# Altium PCB ButtonsBrightnessPCB.PcbDoc
Units mm, origin at the board's own origin, x right, y up, seen from the top; angles counter-clockwise.
Board outline 70.08 x 83.18 mm, 2 copper layers (Top Layer, Bottom Layer); 51 components, 47 nets, 186 pads, 14 vias.
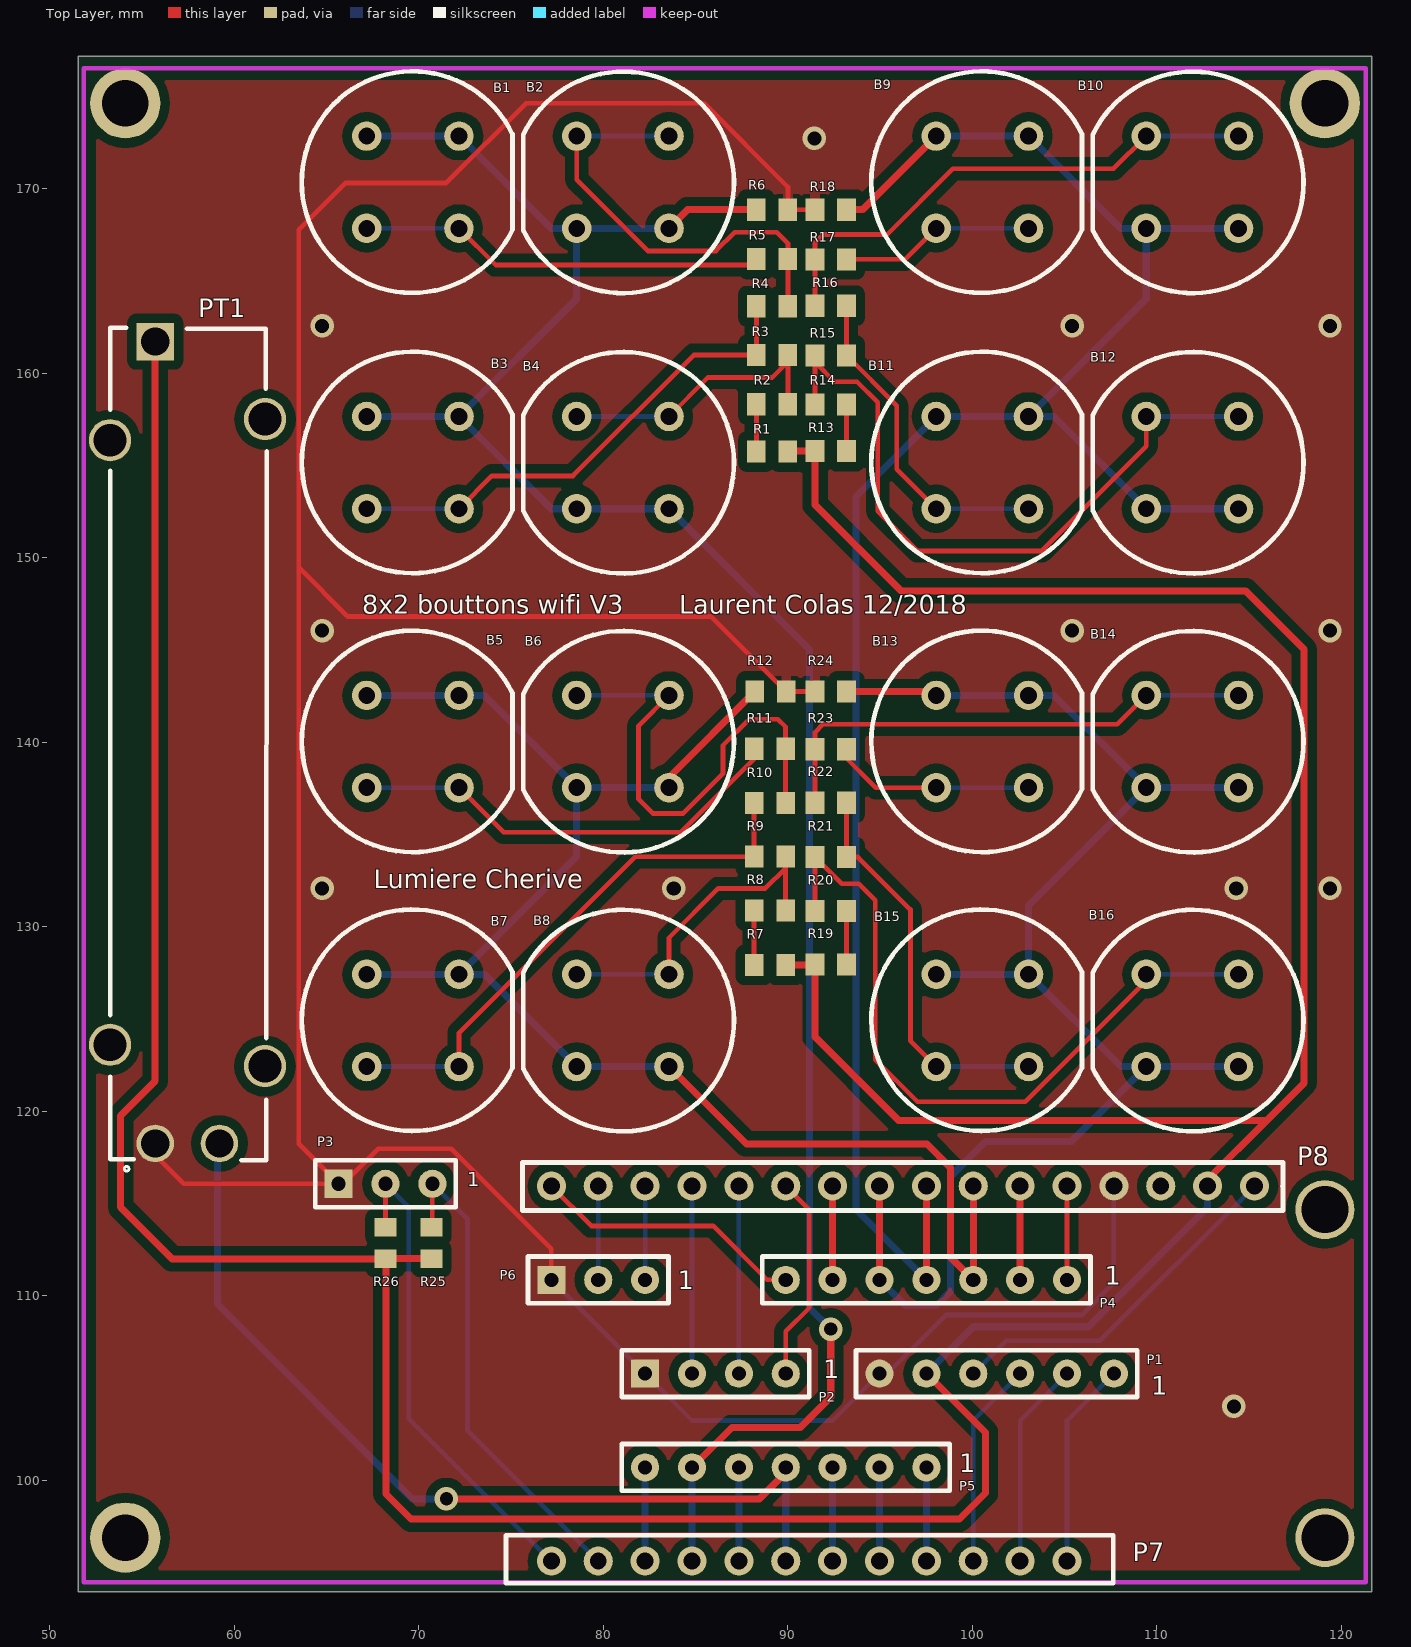
[diagram p0: Top Layer view]
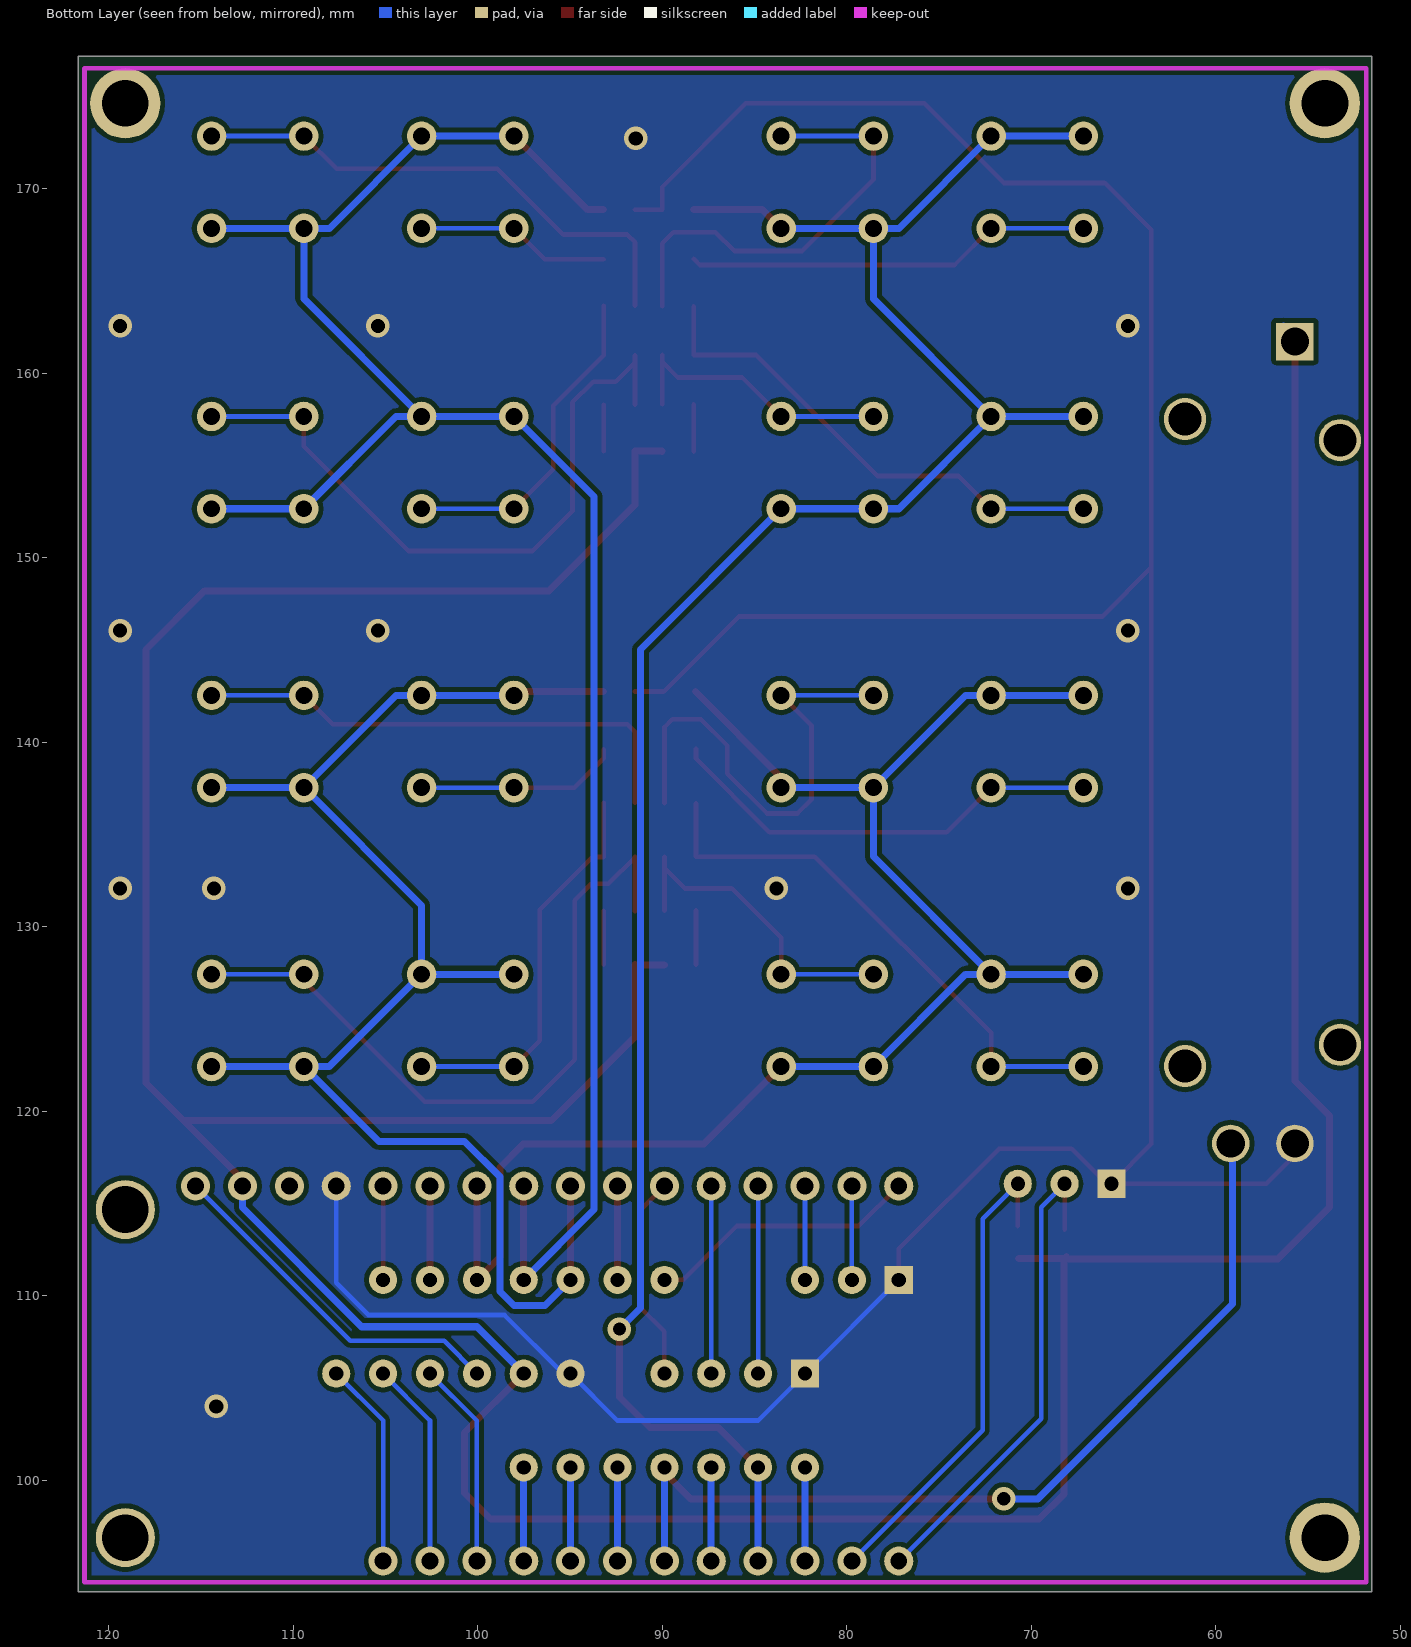
[diagram p1: Bottom Layer view, seen from below]

## Layer stack, top to bottom
Top Solder: solder mask 0.0102, Solder Resist, Dk 3.5
Top Layer: signal copper 0.0356
Dielectric 1: dielectric 0.32, FR-4, Dk 4.8
Bottom Layer: signal copper 0.0356
Bottom Solder: solder mask 0.0102, Solder Resist, Dk 3.5

## Board outline
51.562,93.98 121.641,93.98 121.641,177.165 51.562,177.165

## Design rules (kind name [scope] priority, off if disabled: settings)
Clearance Clearance_4 [InNamedPolygon('GND_L01_P000')] p1: gap=0.508 ignorepadtopadclearanceinfootprint=FALSE
Clearance Clearance_3 [InNamedPolygon('GND_L02_P002')] p2: gap=0.254 ignorepadtopadclearanceinfootprint=FALSE except(0: Arc-Hole Track-Hole SMDPad-Hole THPad-Hole Via-Hole Fill-Hole Poly-Hole Region-Hole Text-Hole)
Clearance Clearance_2 [InNamedPolygon('GND_L02_P002')] p3: gap=0.254 ignorepadtopadclearanceinfootprint=FALSE except(0: Arc-Hole Track-Hole SMDPad-Hole THPad-Hole Via-Hole Fill-Hole Poly-Hole Region-Hole Text-Hole)
Clearance Clearance_1 [InNamedPolygon('GND_L01_P000')] p4: gap=0.508 ignorepadtopadclearanceinfootprint=FALSE
Clearance [All] p5: gap=0.203 ignorepadtopadclearanceinfootprint=FALSE
PolygonConnect PolygonConnect_15 [All vs IsNamedPolygon('GND_L01_P000')] p1: thpad.connectstyle=Direct thpad.reliefconductorwidth=0.254 thpad.reliefentries=4 thpad.polygonreliefangle="90 Angle" thpad.airgapwidth=0.254 smdpad.connectstyle=Relief smdpad.reliefconductorwidth=0.508 smdpad.reliefentries=4 smdpad.polygonreliefangle="90 Angle" smdpad.airgapwidth=0.254 via.connectstyle=Direct via.reliefconductorwidth=0.254 via.reliefentries=4 via.polygonreliefangle="90 Angle" via.airgapwidth=0.254
PolygonConnect PolygonConnect_14 [All vs IsNamedPolygon('GND_L02_P002')] p2: thpad.connectstyle=Direct thpad.reliefconductorwidth=0.254 thpad.reliefentries=4 thpad.polygonreliefangle="90 Angle" thpad.airgapwidth=0.254 smdpad.connectstyle=Relief smdpad.reliefconductorwidth=0.508 smdpad.reliefentries=4 smdpad.polygonreliefangle="90 Angle" smdpad.airgapwidth=0.254 via.connectstyle=Direct via.reliefconductorwidth=0.254 via.reliefentries=4 via.polygonreliefangle="90 Angle" via.airgapwidth=0.254
PolygonConnect PolygonConnect_13 [All vs IsNamedPolygon('GND_L02_P002')] p3: thpad.connectstyle=Direct thpad.reliefconductorwidth=0.254 thpad.reliefentries=4 thpad.polygonreliefangle="90 Angle" thpad.airgapwidth=0.254 smdpad.connectstyle=Relief smdpad.reliefconductorwidth=0.508 smdpad.reliefentries=4 smdpad.polygonreliefangle="90 Angle" smdpad.airgapwidth=0.254 via.connectstyle=Direct via.reliefconductorwidth=0.254 via.reliefentries=4 via.polygonreliefangle="90 Angle" via.airgapwidth=0.254
PolygonConnect PolygonConnect_12 [All vs IsNamedPolygon('GND_L01_P000')] p4: thpad.connectstyle=Direct thpad.reliefconductorwidth=0.254 thpad.reliefentries=4 thpad.polygonreliefangle="90 Angle" thpad.airgapwidth=0.254 smdpad.connectstyle=Relief smdpad.reliefconductorwidth=0.254 smdpad.reliefentries=4 smdpad.polygonreliefangle="90 Angle" smdpad.airgapwidth=0.254 via.connectstyle=Direct via.reliefconductorwidth=0.254 via.reliefentries=4 via.polygonreliefangle="90 Angle" via.airgapwidth=0.254
PolygonConnect PolygonConnect_11 [All vs IsNamedPolygon('botLayer')] p5: thpad.connectstyle=Relief thpad.reliefconductorwidth=0.254 thpad.reliefentries=4 thpad.polygonreliefangle="90 Angle" thpad.airgapwidth=0.254 smdpad.connectstyle=Relief smdpad.reliefconductorwidth=0.254 smdpad.reliefentries=4 smdpad.polygonreliefangle="90 Angle" smdpad.airgapwidth=0.254 via.connectstyle=Direct via.reliefconductorwidth=0.254 via.reliefentries=4 via.polygonreliefangle="90 Angle" via.airgapwidth=0.254
PolygonConnect PolygonConnect_10 [All vs IsNamedPolygon('topLayer')] p6: thpad.connectstyle=Relief thpad.reliefconductorwidth=0.254 thpad.reliefentries=4 thpad.polygonreliefangle="90 Angle" thpad.airgapwidth=0.254 smdpad.connectstyle=Relief smdpad.reliefconductorwidth=0.254 smdpad.reliefentries=4 smdpad.polygonreliefangle="90 Angle" smdpad.airgapwidth=0.254 via.connectstyle=Direct via.reliefconductorwidth=0.254 via.reliefentries=4 via.polygonreliefangle="90 Angle" via.airgapwidth=0.254
PolygonConnect PolygonConnect_9 [All vs IsNamedPolygon('botLayer')] p7: thpad.connectstyle=Relief thpad.reliefconductorwidth=0.254 thpad.reliefentries=4 thpad.polygonreliefangle="90 Angle" thpad.airgapwidth=0.254 smdpad.connectstyle=Relief smdpad.reliefconductorwidth=0.254 smdpad.reliefentries=4 smdpad.polygonreliefangle="90 Angle" smdpad.airgapwidth=0.254 via.connectstyle=Direct via.reliefconductorwidth=0.254 via.reliefentries=4 via.polygonreliefangle="90 Angle" via.airgapwidth=0.254
PolygonConnect PolygonConnect_8 [All vs IsNamedPolygon('topLayer')] p8: thpad.connectstyle=Relief thpad.reliefconductorwidth=0.254 thpad.reliefentries=4 thpad.polygonreliefangle="90 Angle" thpad.airgapwidth=0.254 smdpad.connectstyle=Relief smdpad.reliefconductorwidth=0.254 smdpad.reliefentries=4 smdpad.polygonreliefangle="90 Angle" smdpad.airgapwidth=0.254 via.connectstyle=Direct via.reliefconductorwidth=0.254 via.reliefentries=4 via.polygonreliefangle="90 Angle" via.airgapwidth=0.254
PolygonConnect PolygonConnect_7 [All vs IsNamedPolygon('Bottom Layer-No Net')] p9: thpad.connectstyle=Relief thpad.reliefconductorwidth=0.254 thpad.reliefentries=4 thpad.polygonreliefangle="90 Angle" thpad.airgapwidth=0.254 smdpad.connectstyle=Relief smdpad.reliefconductorwidth=0.254 smdpad.reliefentries=4 smdpad.polygonreliefangle="90 Angle" smdpad.airgapwidth=0.254 via.connectstyle=Direct via.reliefconductorwidth=0.254 via.reliefentries=4 via.polygonreliefangle="90 Angle" via.airgapwidth=0.254
PolygonConnect PolygonConnect_6 [All vs IsNamedPolygon('Bottom Layer-No Net') Or  IsNamedPolygon('Top Layer-No Net')] p10: thpad.connectstyle=Relief thpad.reliefconductorwidth=0.254 thpad.reliefentries=4 thpad.polygonreliefangle="90 Angle" thpad.airgapwidth=0.254 smdpad.connectstyle=Relief smdpad.reliefconductorwidth=0.254 smdpad.reliefentries=4 smdpad.polygonreliefangle="90 Angle" smdpad.airgapwidth=0.254 via.connectstyle=Direct via.reliefconductorwidth=0.254 via.reliefentries=4 via.polygonreliefangle="90 Angle" via.airgapwidth=0.254
PolygonConnect PolygonConnect_5 [All vs IsNamedPolygon('Bottom Layer-No Net')] p11: connectstyle=Relief reliefconductorwidth=0.381 reliefentries=4 polygonreliefangle="90 Angle" airgapwidth=0.254
PolygonConnect PolygonConnect_4 [All vs IsNamedPolygon('Top Layer-No Net')] p12: connectstyle=Relief reliefconductorwidth=0.381 reliefentries=4 polygonreliefangle="90 Angle" airgapwidth=0.254
PolygonConnect PolygonConnect_3 [All vs IsNamedPolygon('Bottom Layer-No Net')] p13: connectstyle=Direct reliefconductorwidth=0.254 reliefentries=4 polygonreliefangle="90 Angle" airgapwidth=0.254
PolygonConnect PolygonConnect_2 [All vs IsNamedPolygon('Top Layer-No Net')] p14: connectstyle=Direct reliefconductorwidth=0.254 reliefentries=4 polygonreliefangle="90 Angle" airgapwidth=0.254
PolygonConnect PolygonConnect_1 [All vs IsNamedPolygon('Bottom Layer-No Net')] p15: thpad.connectstyle=Direct thpad.reliefconductorwidth=0.254 thpad.reliefentries=4 thpad.polygonreliefangle="90 Angle" thpad.airgapwidth=0.254 smdpad.connectstyle=Direct smdpad.reliefconductorwidth=0.254 smdpad.reliefentries=4 smdpad.polygonreliefangle="90 Angle" smdpad.airgapwidth=0.254 via.connectstyle=Relief via.reliefconductorwidth=0.254 via.reliefentries=4 via.polygonreliefangle="90 Angle" via.airgapwidth=0.254
PolygonConnect [All] p16: connectstyle=Relief reliefconductorwidth=0.254 reliefentries=4 polygonreliefangle="90 Angle" airgapwidth=0.254
RoutingVias [All] p1: holewidth=0.635 width=1.016 viastyle="Through Hole" minholewidth=0.711 minwidth=1.27 maxholewidth=0.711 maxwidth=1.27
SolderMaskExpansion [All] p1: expansion=0.102
Width [All] p1: maxlimit=0.508 minlimit=0.203 preferedwidth=0.203
30 further rules are at their usual default settings.

## Components (designator, comment, footprint, x,y, rotation, side; value= is the part's Value field where it differs from the comment)
B1 "Button_D6R90" BUTTON_D6R90 72.133,167.847 r180 top
B2 "Button_D6R90" BUTTON_D6R90 78.613,172.847 r0 top
B3 "Button_D6R90" BUTTON_D6R90 72.136,152.654 r180 top
B4 "Button_D6R90" BUTTON_D6R90 78.613,157.654 r0 top
B5 "Button_D6R90" BUTTON_D6R90 72.136,137.541 r180 top
B6 "Button_D6R90" BUTTON_D6R90 78.613,142.541 r0 top
B7 "Button_D6R90" BUTTON_D6R90 72.136,122.428 r180 top
B8 "Button_D6R90" BUTTON_D6R90 78.613,127.428 r0 top
B9 "Button_D6R90" BUTTON_D6R90 102.994,167.847 r180 top
B10 "Button_D6R90" BUTTON_D6R90 109.474,172.847 r0 top
B11 "Button_D6R90" BUTTON_D6R90 102.994,152.654 r180 top
B12 "Button_D6R90" BUTTON_D6R90 109.477,157.654 r0 top
B13 "Button_D6R90" BUTTON_D6R90 102.997,137.541 r180 top
B14 "Button_D6R90" BUTTON_D6R90 109.474,142.541 r0 top
B15 "Button_D6R90" BUTTON_D6R90 102.997,122.428 r180 top
B16 "Button_D6R90" BUTTON_D6R90 109.474,127.428 r0 top
P1 "Header 6" CONN_6 107.671,105.791 r180 top
P2 "Header 4" CONN_4 89.891,105.791 r180 top
P3 "Header 3" CONN_3 70.739,116.078 r180 top
P4 "Header 7" CONN_7 105.131,110.871 r180 top
P5 "Header 7" CONN_7 97.511,100.711 r180 top
P6 "Header 3" CONN_3 82.271,110.871 r180 top
P7 "Header 12" ESP32_feather_short_pins 105.131,95.631 r180 top
P8 "Header 16" ESP32_feather_long_pins 105.131,95.631 r180 top
PT1 "P090S_pot" POT_PTA3043 59.203,118.262 r0 top
R1 "ERJ-6GEYJ471V" RES_0804_PANASONIC 89.154,155.829 r0 top
R2 "ERJ-6GEYJ471V" RES_0804_PANASONIC 89.154,158.242 r180 top
R3 "ERJ-6GEYJ471V" RES_0804_PANASONIC 89.154,160.909 r180 top
R4 "ERJ-6GEYJ471V" RES_0804_PANASONIC 89.154,163.703 r0 top
R5 "ERJ-6GEYJ471V" RES_0804_PANASONIC 89.154,166.116 r180 top
R6 "ERJ-6GEYJ471V" RES_0804_PANASONIC 89.154,168.933 r0 top
R7 "ERJ-6GEYJ471V" RES_0804_PANASONIC 89.027,128.016 r0 top
R8 "ERJ-6GEYJ471V" RES_0804_PANASONIC 89.027,130.81 r180 top
R9 "ERJ-6GEYJ471V" RES_0804_PANASONIC 89.027,133.731 r180 top
R10 "ERJ-6GEYJ471V" RES_0804_PANASONIC 89.027,136.779 r0 top
R11 "ERJ-6GEYJ471V" RES_0804_PANASONIC 89.027,139.573 r180 top
R12 "ERJ-6GEYJ471V" RES_0804_PANASONIC 89.063,142.823 r0 top
R13 "ERJ-6GEYJ471V" RES_0804_PANASONIC 92.329,155.702 r180 top
R14 "ERJ-6GEYJ471V" RES_0804_PANASONIC 92.329,158.369 r0 top
R15 "ERJ-6GEYJ471V" RES_0804_PANASONIC 92.329,161.036 r0 top
R16 "ERJ-6GEYJ471V" RES_0804_PANASONIC 92.329,163.576 r180 top
R17 "ERJ-6GEYJ471V" RES_0804_PANASONIC 92.329,166.243 r0 top
R18 "ERJ-6GEYJ471V" RES_0804_PANASONIC 92.329,168.783 r180 top
R19 "ERJ-6GEYJ471V" RES_0804_PANASONIC 92.329,127.889 r180 top
R20 "ERJ-6GEYJ471V" RES_0804_PANASONIC 92.329,130.937 r0 top
R21 "ERJ-6GEYJ471V" RES_0804_PANASONIC 92.329,133.858 r0 top
R22 "ERJ-6GEYJ471V" RES_0804_PANASONIC 92.329,136.652 r180 top
R23 "ERJ-6GEYJ471V" RES_0804_PANASONIC 92.329,139.7 r0 top
R24 "ERJ-6GEYJ471V" RES_0804_PANASONIC 92.329,142.673 r180 top
R25 "ERJ-6GEYJ471V" RES_0804_PANASONIC 70.612,112.878 r90 top
R26 "ERJ-6GEYJ471V" RES_0804_PANASONIC 68.124,112.867 r90 top

## Footprints (in the part's own frame and the unit in brackets; to place one, negate y for a bottom-side part, rotate by r counter-clockwise, add the part's x,y. Pads: shape width x height; smd on the part's side, far side on the other; paste and mask are expansions set on the pad)
BUTTON_D6R90 [mm]
  round 1.6 hole 0.914: 1(-0.05,0) 2(4.95,0) 3(-0.05,-5) 4(4.95,-5)
  silkscreen extent -2.95,-8.51 8.47,3.49
CONN_3 [mil]
  round 60 hole 30: 1(0,0) 2(100,0)
  rect 60x60 hole 30: 3(200,0)
  silkscreen extent -50,-50 250,50
CONN_4 [mil]
  round 60 hole 30: 1(0,0) 2(100,0) 3(200,0)
  rect 60x60 hole 30: 4(300,0)
  silkscreen extent -50,-50 350,50
CONN_6 [mil]
  round 60 hole 30: 1(0,0) 2(100,0) 3(200,0) 4(300,0) 5(400,0) 6(500,0)
  silkscreen extent -50,-50 550,50
CONN_7 [mil]
  round 60 hole 30: 1(0,0) 2(100,0) 3(200,0) 4(300,0) 5(400,0) 6(500,0) 7(600,0)
  silkscreen extent -50,-50 650,50
ESP32_feather_long_pins [mil]
  round 62 hole 36: 1(-400,-800) 2(-300,-800) 3(-200,-800) 4(-100,-800) 5(0,-800) 6(100,-800) 7(200,-800) 8(300,-800) 9(400,-800) 10(500,-800) 11(600,-800) 12(700,-800) 13(800,-800) 14(900,-800) 15(1000,-800) 16(1100,-800)
  round 125.98 hole 100: S2(-550,-750)
  silkscreen extent -461,-850 1161,-748
ESP32_feather_short_pins [mil]
  round 62 hole 36: 1(0,0) 2(100,0) 3(200,0) 4(300,0) 5(400,0) 6(500,0) 7(600,0) 8(700,0) 9(800,0) 10(900,0) 11(1000,0) 12(1100,0)
  round 125.98 hole 100: S1(-550,-50)
  silkscreen extent -98,-55 1197,47
POT_PTA3043 [mil]
  round 80 hole 60 mask+0: 1(-137,0) 2(0,0)
  rect 80x80 hole 60 mask+0: 3(-137,1710.51)
  round 90 hole 70 mask+0: 4(97.46,1545.28) 5(97.16,165) 6(-233.27,1500.2) 7(-233.27,210.5)
  silkscreen extent -233,-59 101,1740
RES_0804_PANASONIC [mm]
  rect 1.006x1.2 smd: 1(-0.853,-0.075) 2(0.853,-0.075)

## Part data
P1: "Header, 6-Pin", LatestRevisionDate=17-Jul-2002, LatestRevisionNote="Re-released for DXP Platform.", Publisher="Altium Limited"
P2: "Header, 4-Pin", LatestRevisionDate=17-Jul-2002, LatestRevisionNote="Re-released for DXP Platform.", Publisher="Altium Limited"
P3 P6: "Header, 3-Pin", LatestRevisionDate=17-Jul-2002, LatestRevisionNote="Re-released for DXP Platform.", Publisher="Altium Limited"
P4 P5: "Header, 7-Pin", LatestRevisionDate=17-Jul-2002, LatestRevisionNote="Re-released for DXP Platform.", Publisher="Altium Limited"
P7: "Header, 12-Pin", LatestRevisionDate=17-Jul-2002, LatestRevisionNote="Re-released for DXP Platform.", Publisher="Altium Limited"
P8: "Header, 16-Pin", LatestRevisionDate=17-Jul-2002, LatestRevisionNote="Re-released for DXP Platform.", Publisher="Altium Limited"
R1 R2 R3 R4 R5 R6 R7 R8 R9 R10 R11 R12 R13 R14 R15 R16 R17 R18 R19 R20 R21 R22 R23 R24 R25 R26: Built_By=EMA_UL_Team, C="Copyright (C) 2015 Accelerated Designs. All rights reserved", Manufacturer_Part_Number=ERJ-6GEYJ471V, Vendor=Panasonic

## Free pads (board coordinates)
  round 3.81 hole 2.54: 8(54.102,96.901) 8(54.102,174.625) 9(119.101,174.625)

## Via types
v1: diameter 1.27, hole 0.762, Top Layer to Bottom Layer, 12 vias
v2: diameter 1.27, hole 0.711, Top Layer to Bottom Layer, 2 vias

## Nets (pads, with @x,y where several pads share a name; then routed paths per layer and width w, separated by ;. In a path a pad name is that pad's centre, name@x,y a point inside that pad or via, vN(x,y) a via of type N, cw(c..) or ccw(c..) an arc to the next point about the centre after c; other vN are vias at no path point)
3.3V: P1.5 P8.2 PT1.3 R1.2 R7.2 R13.2 R19.2 R25.1 R26.1 | length 238.9
  Top Layer w0.381: PT1.3 55.724,121.637 53.848,119.761 53.848,114.808 56.642,112.014 R26.1 68.224,112.014 68.224,99.263 69.583,97.904 99.301,97.904 100.711,99.314 100.711,102.591 P1.5 P1.5@97.511,106.197 ; R26.1@68.097,112.141 68.214,112.025 R25.1 ; R7.2 91.453,127.941 R19.2 91.476,124.043 96.012,119.507 115.951,119.507 ; R1.2 90.03,155.777 R13.2 91.476,152.872 96.139,148.209 114.808,148.209 117.983,145.034 117.983,121.539 115.951,119.507 ; P8.2 112.751,116.307 115.951,119.507
  Bottom Layer w0.381: PT1.3@55.622,161.836 PT1.3@56.346,162.56 ; P1.5 100.051,108.331 106.299,108.331 112.751,114.783 P8.2
A0: P4.1 P8.5 | length 5.1
  Top Layer w0.254: P4.1 P8.5
A1: P4.2 P8.6 | length 5.1
  Top Layer w0.381: P4.2 P8.6
A2: B5.3 B5.4 B6.3 B6.4 B7.3 B7.4 B8.3 B8.4 P4.3 P8.7 R12.1 | length 86
  Top Layer w0.381: B8.4 87.754,118.237 97.536,118.237 98.806,116.967 98.806,112.116 P4.3 P8.7 ; B6.4 83.563,138.101 R12.1
  Bottom Layer w0.381: B7.4 B7.3 ; B5.4 B5.3 73.563,142.541 B6.3 ; B8.4 B8.3 73.563,127.428 B7.3 ; B6.4 B6.3 ; B7.3 78.563,133.805 B6.3
A3: B9.3 B9.4 B10.3 B10.4 B11.3 B11.4 B12.3 B12.4 P4.4 P8.8 R18.1 | length 112
  Top Layer w0.381: R18.1 94.055,168.858 B9.4 ; P4.4 P8.8
  Bottom Layer w0.381: P4.4 93.701,114.681 93.701,153.311 B11.4 B11.3 ; P8.8@97.511,115.443 P8.8 ; B9.4 B9.3 108.044,167.847 B10.3 ; B10.4 B10.3 ; B12.4 B12.3 104.427,157.654 B11.3 ; B11.3 109.424,164.034 B10.3
A4: B13.3 B13.4 B14.3 B14.4 B15.3 B15.4 B16.3 B16.4 P4.5 P8.9 R24.1 | length 83.7
  Top Layer w0.381: R24.1 97.84,142.748 B13.4 ; P4.5 P8.9
  Bottom Layer w0.381: P4.5 96.364,109.478 98.048,109.478 98.806,110.236 98.806,116.459 100.711,118.364 105.36,118.364 B16.3 ; B15.4 B15.3 ; B13.4 B13.3 104.424,142.541 B14.3 ; B16.4 B16.3 ; B14.4 B14.3 ; B15.3 103.047,131.164 B14.3 ; B15.3 108.047,122.428 B16.3
A5: P4.6 P8.10 | length 5.1
  Top Layer w0.381: P4.6 P8.10
BAT: P1.1 P7.1 | length 11.2
  Bottom Layer w0.254: P7.1 105.131,103.251 P1.1
EN: P1.2 P7.2 | length 11.2
  Bottom Layer w0.254: P7.2 102.591,103.251 P1.2
GND: P1.6 P2.4 P3.3 P6.3 P8.4 PT1.1 R6.2 R12.2 R18.2 R24.2 | length 186.7
  Top Layer w0.254: PT1.1 55.724,117.631 57.277,116.078 P3.3 ; P6.3 77.191,112.547 71.755,117.983 67.818,117.983 65.913,116.078 P3.3 ; R24.2 R12.2 85.852,146.812 66.167,146.812 63.5,149.479 ; R18.2 R6.2 90.007,170.089 85.471,174.625 75.819,174.625 71.501,170.307 66.04,170.307 63.5,167.767 63.5,149.479 ; 63.5,149.479 63.5,118.237 P3.3
  Bottom Layer w0.254: P6.3 P2.4 84.811,103.251 92.431,103.251 P1.6 95.377,105.791 98.552,108.966 105.918,108.966 107.671,110.719 P8.4
  other v1: 114.173,104.013 64.77,132.08 83.82,132.08 114.3,132.08 119.38,132.08 64.77,146.05 105.41,146.05 119.38,146.05 64.77,162.56 105.41,162.56 119.38,162.56 91.44,172.72
IO12: P5.2 P7.5 | length 5.1
  Bottom Layer w0.381: P7.5 P5.2
IO13: P5.1 P7.4 | length 5.1
  Bottom Layer w0.381: P7.4 P5.1
IO14: P5.7 P7.10 | length 5.1
  Bottom Layer w0.381: P7.10 P5.7
IO15: P5.5 P7.8 | length 5.1
  Bottom Layer w0.381: P7.8 P5.5
IO21: P4.7 P8.16 | length 14.8
  Top Layer w0.254: P8.16 79.35,113.792 85.954,113.792 88.875,110.871 P4.7
IO27: P5.3 P7.6 | length 5.1
  Bottom Layer w0.381: P7.6 P5.3
IO32: B1.3 B1.4 B2.3 B2.4 B3.3 B3.4 B4.3 B4.4 P5.6 P7.9 R6.1 | length 120.8
  Top Layer w0.381: B2.4 84.574,168.858 R6.1 ; P5.6 86.97,102.87 90.678,102.87 92.329,104.521 v2(92.329,108.204)
  Bottom Layer w0.381: B1.4 B1.3 77.183,167.847 B2.3 ; B3.4 B3.3 ; B2.4 B2.3 ; P7.9 P5.6 ; v2(92.329,108.204) 91.186,109.347 91.186,145.031 B4.4 B4.3 77.186,152.654 B3.3 ; B3.3 78.563,164.031 B2.3
IO33: P5.4 P7.7 PT1.2 | length 49.9
  Top Layer w0.381: v2@71.501,98.933 v2@71.653,99.085 ; v2@71.653,99.009 88.468,99.009 89.891,100.432 P5.4
  Bottom Layer w0.381: PT1.2@59.102,118.262 59.102,109.554 69.647,99.009 v2(71.501,99.009) ; P7.7 P5.4
MISO: P2.3 P8.13 | length 10.2
  Bottom Layer w0.254: P2.3 P8.13
MOSI: P2.2 P8.12 | length 10.2
  Bottom Layer w0.254: P2.2 P8.12
NetB1_1: B1.1 B1.2 R5.2 | length 22.1
  Top Layer w0.254: B1.1 74.168,165.862 87.972,165.862 R5.2
  Bottom Layer w0.254: B1.2 B1.1
NetB2_1: B2.1 B2.2 R4.2 R5.1 | length 24.5
  Top Layer w0.254: B2.1 78.563,170.484 82.423,166.624 86.106,166.624 87.122,167.64 89.408,167.64 90.007,167.041 R5.1 R4.2
  Bottom Layer w0.254: B2.1 B2.2
NetB3_1: B3.1 B3.2 R3.2 R4.1 | length 27.2
  Top Layer w0.254: B3.1 73.964,154.432 78.359,154.432 84.911,160.984 R3.2 R4.1
  Bottom Layer w0.254: B3.2 B3.1
NetB4_1: B4.1 B4.2 R2.1 R3.1 | length 15.3
  Top Layer w0.254: B4.2 85.675,159.766 89.154,159.766 R3.1@90.007,160.619 ; R2.1 R3.1@90.007,160.619 ; R3.1 R3.1@90.007,160.619
  Bottom Layer w0.254: B4.1 B4.2
NetB5_1: B5.1 B5.2 R11.2 | length 24.2
  Top Layer w0.254: B5.1 74.599,135.128 84.201,135.128 88.174,139.101 R11.2
  Bottom Layer w0.254: B5.2 B5.1
NetB6_1: B6.1 B6.2 R10.2 R11.1 | length 26.9
  Top Layer w0.254: B6.2 81.915,140.893 81.915,136.906 82.677,136.144 84.328,136.144 86.487,138.303 86.487,139.827 87.909,141.249 89.459,141.249 89.88,140.828 R11.1 R10.2
  Bottom Layer w0.254: B6.1 B6.2
NetB7_1: B7.1 B7.2 R9.2 R10.1 | length 29.7
  Top Layer w0.254: B7.1 72.186,124.256 81.736,133.806 R9.2 R10.1
  Bottom Layer w0.254: B7.2 B7.1
NetB8_1: B8.1 B8.2 R8.1 R9.1 | length 17.8
  Top Layer w0.254: B8.2 83.563,129.41 86.233,132.08 88.773,132.08 89.88,133.187 ; R8.1 89.88,133.187 ; R9.1 89.88,133.187
  Bottom Layer w0.254: B8.1 B8.2
NetB9_1: B9.1 B9.2 R17.2 | length 10.6
  Top Layer w0.254: R17.2 96.365,166.168 B9.2
  Bottom Layer w0.254: B9.2 B9.1
NetB10_1: B10.1 B10.2 R16.2 R17.1 | length 28.8
  Top Layer w0.254: R16.2 R17.1 91.476,167.092 91.897,167.513 95.377,167.513 98.933,171.069 107.646,171.069 B10.1
  Bottom Layer w0.254: B10.1 B10.2
NetB11_1: B11.1 B11.2 R15.2 R16.1 | length 18
  Top Layer w0.254: R16.1 R15.2 95.91,158.232 95.91,154.788 B11.2
  Bottom Layer w0.254: B11.2 B11.1
NetB12_1: B12.1 B12.2 R14.1 R15.1 | length 37.3
  Top Layer w0.254: R14.1 R15.1@91.476,160.593 ; R15.1 R15.1@91.476,160.593 ; B12.1 109.427,156.036 103.759,150.368 97.028,150.368 94.869,152.527 94.869,158.42 93.751,159.537 92.532,159.537 R15.1@91.476,160.593
  Bottom Layer w0.254: B12.1 B12.2
NetB13_1: B13.1 B13.2 R23.2 | length 11
  Top Layer w0.254: R23.2 93.182,139.127 94.767,137.541 B13.2
  Bottom Layer w0.254: B13.2 B13.1
NetB14_1: B14.1 B14.2 R22.2 R23.1 | length 27.6
  Top Layer w0.254: R22.2 R23.1 91.476,140.541 91.906,140.97 107.853,140.97 B14.1
  Bottom Layer w0.254: B14.1 B14.2
NetB15_1: B15.1 B15.2 R21.2 R22.1 | length 21.7
  Top Layer w0.254: R22.1 R21.2 93.801,133.783 96.647,130.937 96.647,123.828 B15.2
  Bottom Layer w0.254: B15.2 B15.1
NetB16_1: B16.1 B16.2 R20.1 R21.1 | length 39.5
  Top Layer w0.254: R20.1 R21.1 92.925,132.334 93.853,132.334 94.742,131.445 94.742,122.809 97.028,120.523 102.87,120.523 109.424,127.077 B16.1
  Bottom Layer w0.254: B16.1 B16.2
NetR1_1: R1.1 R2.2 | length 2.6
  Top Layer w0.254: R1.1 R2.2
NetR7_1: R7.1 R8.2 | length 2.9
  Top Layer w0.254: R7.1 R8.2
NetR13_1: R13.1 R14.2 | length 2.5
  Top Layer w0.254: R13.1 R14.2
NetR19_1: R19.1 R20.2 | length 2.9
  Top Layer w0.254: R19.1 R20.2
RST: P1.4 P8.1 | length 19.4
  Bottom Layer w0.254: P1.4 101.829,107.569 106.909,107.569 P8.1
RX: P6.1 P8.14 | length 5.1
  Bottom Layer w0.254: P6.1 P8.14
SCK: P2.1 P8.11 | length 11.2
  Top Layer w0.254: P2.1 89.891,108.077 91.161,109.347 91.161,114.681 P8.11
SCL: P3.1 P7.11 R25.2 | length 26.5
  Top Layer w0.254: R25.2@70.739,113.792 P3.1
  Bottom Layer w0.254: P3.1 72.644,114.173 72.644,102.718 P7.11
SDA: P3.2 P7.12 R26.2 | length 26.7
  Top Layer w0.254: R26.2@68.199,113.593 R26.2 P3.2
  Bottom Layer w0.254: P3.2 69.469,114.808 69.469,103.353 P7.12
TX: P6.2 P8.15 | length 5.1
  Bottom Layer w0.254: P6.2 P8.15
USB: P1.3 P7.3 | length 11.2
  Bottom Layer w0.254: P7.3 100.051,103.251 P1.3
pads on no net: P7.S1 P8.3 P8.S2 PT1.4 PT1.5 PT1.6 PT1.7

## Polygon pours and split planes (outlines as drawn)
GND on Top Layer "GND_L01_P000" (solid, remove dead copper, pour order 0): 51.562,177.165 121.641,177.165 121.641,93.98 51.562,93.98
GND on Bottom Layer "GND_L02_P002" (solid, remove dead copper, pour order 2): 51.562,177.165 121.641,177.165 121.641,93.98 51.562,93.98

## Keep-outs
Keep-Out Layer:
  lines w0.254: 51.85,94.488 51.85,176.53 121.31,176.53 121.31,94.488 51.85,94.488

## Silkscreen, mask and mechanical layers (free items; w line width, h text height)
Top Overlay:
  text "8x2 bouttons wifi V3       Laurent Colas 12/2018" at 66.929,146.964 h1.02
  text "Lumiere Cherive" at 67.564,132.08 h1.02
Mechanical 1:
  lines w0.254: 51.537,93.98 51.537,177.165 121.641,177.165 121.641,93.98 51.537,93.98

## Text inside footprints (layer, text, board x,y; h text height)
P1: Top Overlay "1" at 109.703,104.648 h1.02
P2: Top Overlay "1" at 91.923,105.537 h1.02
P3: Top Overlay "1" at 72.644,115.951 h0.76
P4: Top Overlay "1" at 107.163,110.617 h1.02
P5: Top Overlay "1" at 99.289,100.457 h1.02
P6: Top Overlay "1" at 84.049,110.363 h1.02